# Altium PCB gprs1.PcbDoc (part 1 of 2)
Units mil, origin at the board's own origin, x right, y up, seen from the top; angles counter-clockwise.
Board outline 5204.72 x 2838.58 mil, 2 copper layers (Top Layer, Bottom Layer); 114 components, 66 nets, 333 pads, 440 vias.
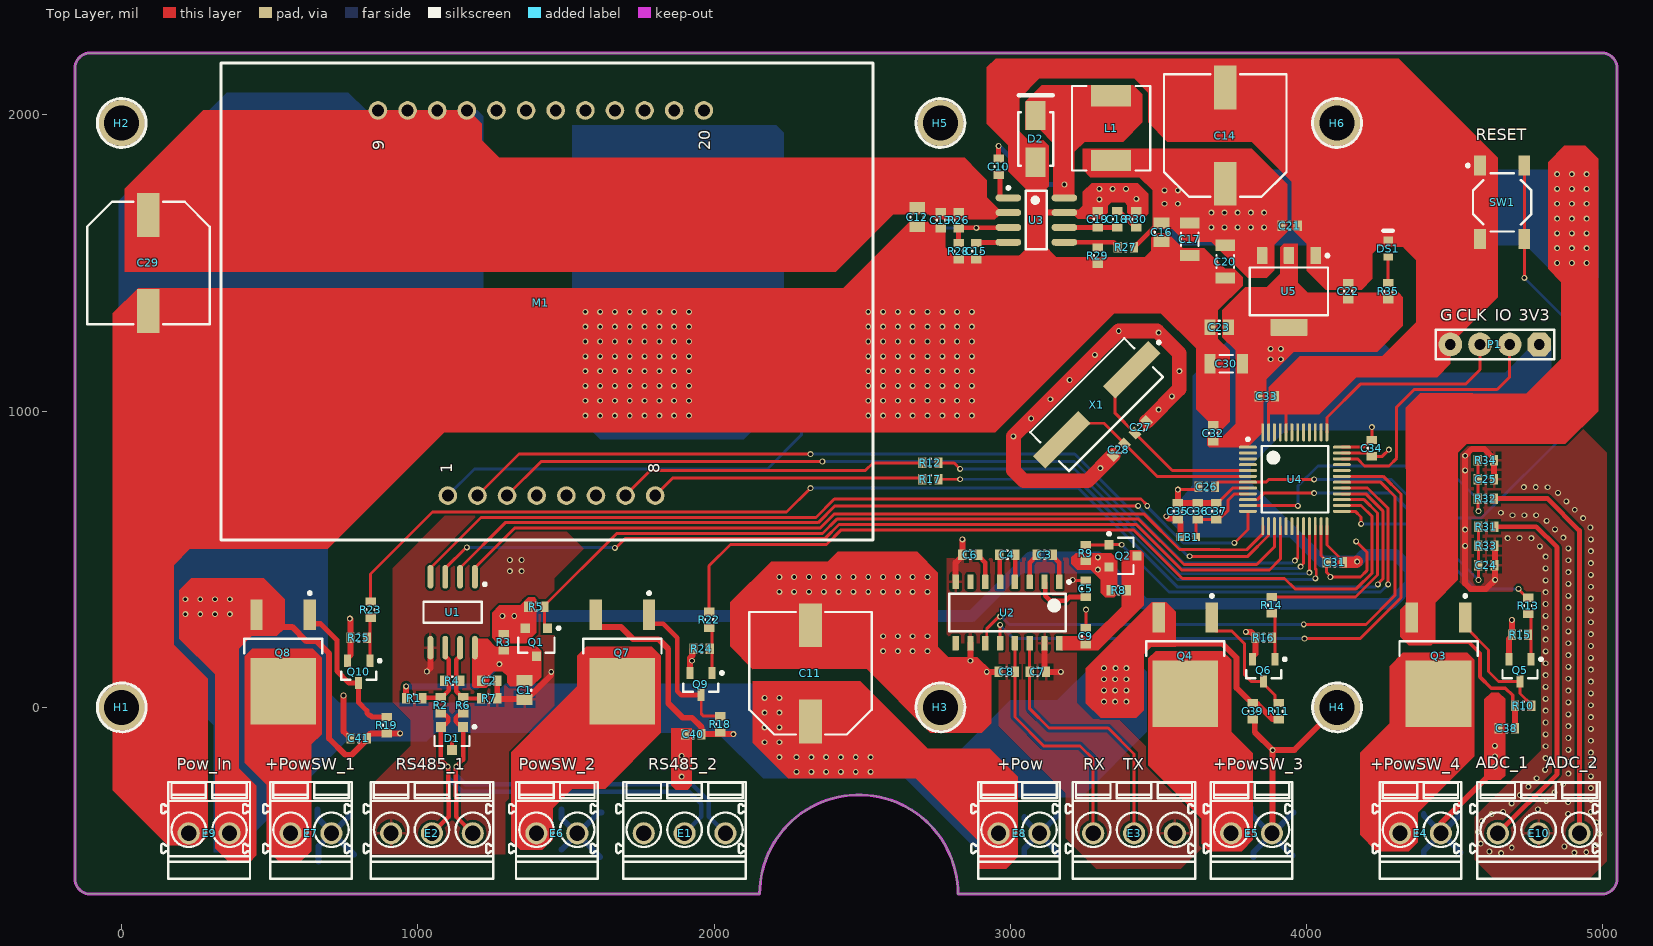
[diagram p0: Top Layer view]
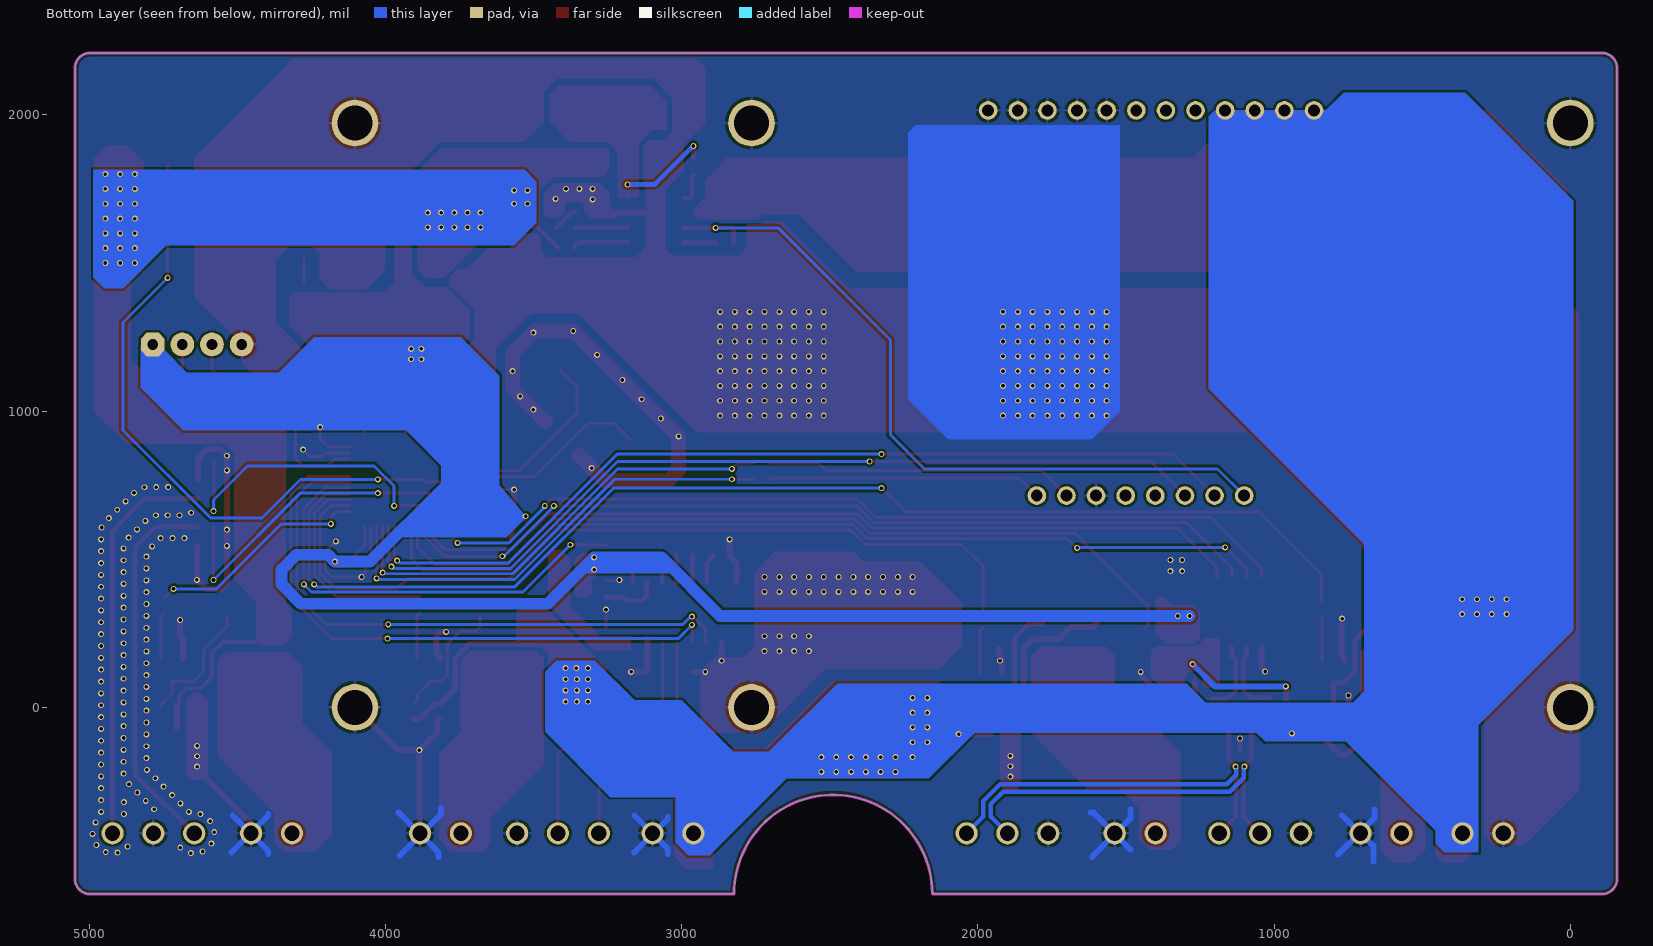
[diagram p1: Bottom Layer view, seen from below]
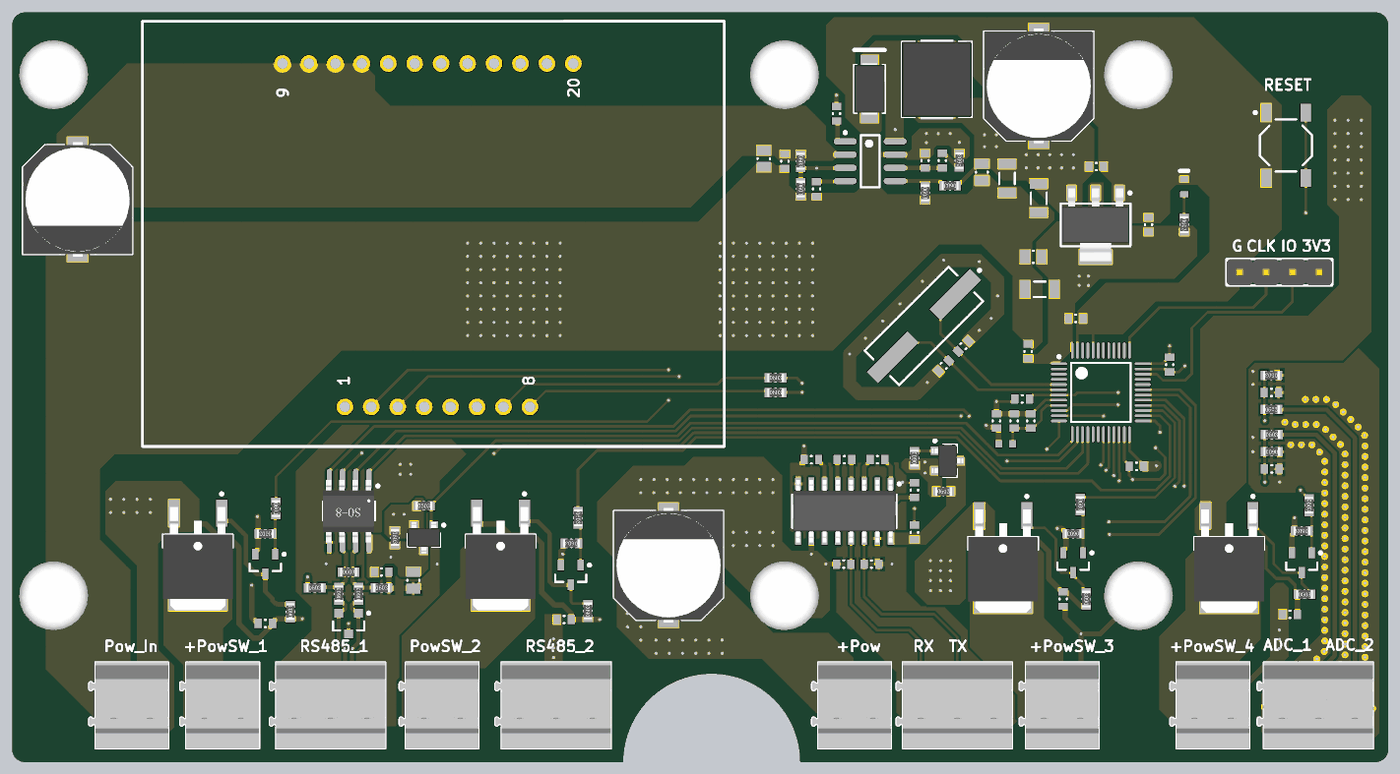
[diagram p3: 3D render of the assembled board from above, using the file's embedded part models]

## Layer stack, top to bottom
Top Solder: solder mask 0.4, Solder Resist, Dk 3.5
Top Layer: signal copper 1.4
Dielectric 1: dielectric 12.6, FR-4, Dk 4.8
Bottom Layer: signal copper 1.4
Bottom Solder: solder mask 0.4, Solder Resist, Dk 3.5

## Board outline
-157.48,-579.92 -157.48,2158.66 cw(c-107.48,2158.66) -107.48,2208.66 4997.24,2208.66 cw(c4997.24,2158.66) 5047.24,2158.66 5047.24,-579.92 cw(c4997.24,-579.92) 4997.24,-629.92 2822.83,-629.92 ccw(c2488.19,-629.92) 2153.54,-629.92 -107.48,-629.92 cw(c-107.48,-579.92)

## Design rules (kind name [scope] priority, off if disabled: settings)
Clearance [All] p1: gap=8 ignorepadtopadclearanceinfootprint=TRUE
DiffPairsRouting [All] p1: maxlimit=10 minlimit=10 mostfreqgap=10 toplayer_minwidth=15 toplayer_maxwidth=15 toplayer_prefwidth=15 bottomlayer_minwidth=15 bottomlayer_maxwidth=15 bottomlayer_prefwidth=15 maxuncoupledlength=500
MinimumSolderMaskSliver [All] p1: minsoldermaskwidth=1
PolygonConnect [All] p1: thpad.connectstyle=Relief thpad.reliefconductorwidth=10 thpad.reliefentries=4 thpad.polygonreliefangle="90 Angle" thpad.airgapwidth=10 smdpad.connectstyle=Relief smdpad.reliefconductorwidth=10 smdpad.reliefentries=4 smdpad.polygonreliefangle="90 Angle" smdpad.airgapwidth=10 via.connectstyle=Direct via.reliefconductorwidth=10 via.reliefentries=4 via.polygonreliefangle="90 Angle" via.airgapwidth=10
RoutingVias [All] p1: holewidth=12 width=20 viastyle="Through Hole" minholewidth=12 minwidth=20 maxholewidth=12 maxwidth=20
SolderMaskExpansion [All] p1: expansion=3
Width [All] p1: maxlimit=100 minlimit=8 preferedwidth=10
28 further rules are at their usual default settings.

## Classes and differential pairs
component class stm32f103c8: C20 C21 C22 C23 C24 C25 C26 C27 C28 C29 C30 C31 C32 C33 C34 C35 C36 C37 DS1 E10 FB1 M1 P1 R12 R17 R31 R32 R33 R34 R35 SW1 U4 U5 X1
component class power: C10 C11 C12 C13 C14 C15 C16 C17 C18 C19 C38 C39 C40 C41 D2 E4 E5 E6 E7 E8 E9 H1 H2 H3 H4 H5 H6 L1 Q3 Q4 Q5 Q6 Q7 Q8 Q9 Q10 R10 R11 R13 R14 R15 R16 R18 R19 R22 R23 R24 R25 R26 R27 R28 R29 R30 U3
component class 485&232: C1 C2 C3 C4 C5 C6 C7 C8 C9 D1 E1 E2 E3 Q1 Q2 R1 R2 R3 R4 R5 R6 R7 R8 R9 U1 U2
differential pair RS485: +RS485_P -RS485_N
differential pair 485: +485_P -485_N

## Components (designator, comment, footprint, x,y, rotation, side; value= is the part's Value field where it differs from the comment)
C1 "10uF" CAPC0805(2012)145_L 1360,58.5 r90 top
C2 "0.1uF" CAPC0603(1608)100_L 1240,90 r180 top
C3 "0.1uF" CAPC0603(1608)100_L 3115,515 r180 top
C4 "0.1uF" CAPC0603(1608)100_L 2990,515 r0 top
C5 "0.1uF" CAPC0603(1608)100_L 3255,400 r90 top
C6 "0.1uF" CAPC0603(1608)100_L 2865,515 r180 top
C7 "100pF" CAPC0603(1608)100_L 3092.56,120 r180 top
C8 "100pF" CAPC0603(1608)100_L 2987.44,120 r0 top
C9 "0.1uF" CAPC0603(1608)100_L 3255,240 r270 top
C10 "0.1uF" CAPC0603(1608)100_L 2960,1825 r90 top
C11 "VZL681M1CTR-1010" PNSC-SVP-F12_L 2325,115 r90 top
C12 "10uF" CAPC0805(2012)145_L 2685,1655 r90 top
C13 "0.1uF" CAPC0603(1608)100_L 2765,1645 r90 top
C14 "VEJ102M1ATR-1010" PNSC-SVP-F12_L 3725,1930 r90 top
C15 "0.1uF" CAPC0603(1608)100_L 2885,1540 r90 top
C16 "10uF" CAPC0805(2012)145_L 3510,1603.5 r90 top
C17 "47uF" CAPC1206(3216)150_L 3605,1580 r90 top
C18 "4700pF" CAPC0603(1608)100_L 3360,1647.56 r270 top
C19 "39pF" CAPC0603(1608)100_L 3295,1647.56 r270 top
C20 "47uF" CAPC1206(3216)150_L 3725,1504.88 r90 top
C21 "0.1uF" CAPC0603(1608)100_L 3942.44,1625 r180 top
C22 "0.1uF" CAPC0603(1608)100_L 4140,1405 r270 top
C23 "10uF" CAPC0805(2012)145_L 3705,1282.87 r0 top
C24 "1nF" CAPC0603(1608)100_L 4606.44,480 r180 top
C25 "1nF" CAPC0603(1608)100_L 4604.94,769.76 r180 top
C26 "0.1uF" CAPC0603(1608)100_L 3662.59,745 r0 top
C27 "20pF" CAPC0603(1608)100_L 3440,945 r225 top
C28 "20pF" CAPC0603(1608)100_L 3365.78,870 r45 top
C29 "6SVP820M" PNSC-SVP-F12_L 90,1500 r270 top
C30 "47uF" CAPC1206(3216)150_L 3728.62,1160 r0 top
C31 "0.1uF" CAPC0603(1608)100_L 4095,490 r0 top
C32 "0.1uF" CAPC0603(1608)100_L 3685,925 r270 top
C33 "0.1uF" CAPC0603(1608)100_L 3865,1050 r180 top
C34 "0.1uF" CAPC0603(1608)100_L 4220,875 r90 top
C35 "10uF" CAPC0603(1608)100_L 3565,661.73 r270 top
C36 "0.1uF" CAPC0603(1608)100_L 3631.85,661.73 r270 top
C37 "1nF" CAPC0603(1608)100_L 3695,661.73 r270 top
C38 "0.1uF" CAPC0603(1608)100_L 4675,-70 r0 top
C39 "0.1uF" CAPC0603(1608)100_L 3817.6,-12.49 r90 top
C40 "0.1uF" CAPC0603(1608)100_L 1930,-90 r0 top
C41 "0.1uF" CAPC0603(1608)100_L 800,-105 r0 top
D1 "CDSOT23-SM712" BOUR-SOT23-3_V 1115,-105 r270 top
D2 "B340A-13-F" DIOD-SMA-2_V 3085,1918.74 r90 top
DS1 "TLMS1100-GS08" VISH-TLMX1100_V 4275,1548.54 r90 top
E1 "1667770000" LM_3_5_90_03 1900,-415.16 r180 top
E2 "1667770000" LM_3_5_90_03 1047.2,-415.16 r180 top
E3 "1667770000" LM_3_5_90_03 3417.2,-415.16 r180 top
E4 "1667750000" LM_3_5_90_02 4383.9,-415.16 r180 top
E5 "1667750000" LM_3_5_90_02 3813.9,-415.16 r180 top
E6 "1667750000" LM_3_5_90_02 1468.9,-415.16 r180 top
E7 "1667750000" LM_3_5_90_02 638.9,-415.16 r180 top
E8 "1667750000" LM_3_5_90_02 3028.9,-415.16 r180 top
E9 "1667750000" LM_3_5_90_02 295,-415.16 r180 top
E10 "1667770000" LM_3_5_90_03 4782.8,-415.16 r180 top
FB1 "BLM18BB141SN1D" MURA-BLM18-RF-H4-CHIP-2_V 3600,575 r0 top
H1 "HOLE" HOLE_Φ3_3 0,0 r0 top locked
H2 "HOLE" HOLE_Φ3_3 0,1972.44 r0 top locked
H3 "HOLE" HOLE_Φ3_3 2763.78,0 r0 top locked
H4 "HOLE" HOLE_Φ3_3 4102.36,0 r0 top locked
H5 "HOLE" HOLE_Φ3_3 2763.78,1972.44 r0 top locked
H6 "HOLE" HOLE_Φ3_3 4102.36,1972.44 r0 top locked
L1 "IHLP2525CZER6R8" VISH-IHLP2525CZER220M11_V 3340,1955 r270 top
M1 "GPRS" GPRS 1100.83,715 r90 top locked
P1 "UART1" header4 4785,1225 r180 top
Q1 "AO3401A" AO-SOT-23-3L_V 1400,220 r270 top
Q2 "AO3401A" AO-SOT-23-3L_V 3380,511.06 r0 top
Q3 "AOD417" DIOD-TO252-3_V 4445,143.94 r270 top
Q4 "AOD417" DIOD-TO252-3_V 3590,143.94 r270 top
Q5 "S8050" KOCN-SOT23-3_L 4720,125 r270 top
Q6 "S8050" KOCN-SOT23-3_L 3855,125 r270 top
Q7 "AOD417" DIOD-TO252-3_V 1690,153.33 r270 top
Q8 "AOD417" DIOD-TO252-3_V 545,153.33 r270 top
Q9 "S8050" KOCN-SOT23-3_L 1955,78.76 r270 top
Q10 "S8050" KOCN-SOT23-3_L 800,120 r270 top
R1 "720" RESC0603(1608)_L 987.44,30 r0 top
R2 "10" RESC0603(1608)_L 1077.6,7.6 r90 top
R3 "DNP" RESC0603(1608)_L 1290,220 r270 top
R4 "120" RESC0603(1608)_L 1115,90 r0 top
R5 "100k" RESC0603(1608)_L 1400,340.12 r0 top
R6 "10" RESC0603(1608)_L 1152.4,7.6 r90 top
R7 "720" RESC0603(1608)_L 1240,30 r0 top
R8 "DNP" RESC0603(1608)_L 3365,395 r0 top
R9 "100k" RESC0603(1608)_L 3255,521.06 r90 top
R10 "4.7K" RESC0603(1608)_L 4730.4,5 r0 top
R11 "4.7K" RESC0603(1608)_L 3905,-12.49 r90 top
R12 "22" RESC0603(1608)_L 2730,825 r0 top
R13 "4.7K" RESC0603(1608)_L 4747.56,342.56 r270 top
R14 "4.7K" RESC0603(1608)_L 3882.8,345 r270 top
R15 "10K" RESC0603(1608)_L 4720,245 r180 top
R16 "10K" RESC0603(1608)_L 3855,235 r180 top
R17 "22" RESC0603(1608)_L 2730,769.42 r0 top
R18 "4.7K" RESC0603(1608)_L 2020,-57.4 r90 top
R19 "4.7K" RESC0603(1608)_L 895,-60 r90 top
R22 "4.7K" RESC0603(1608)_L 1982.56,295 r270 top
R23 "4.7K" RESC0603(1608)_L 840,330 r270 top
R24 "10K" RESC0603(1608)_L 1957.56,198.33 r180 top
R25 "10K" RESC0603(1608)_L 800,235 r180 top
R26 "DNP" RESC0603(1608)_L 2825,1645 r270 top
R27 "10K" RESC0603(1608)_L 3390,1552.56 r180 top
R28 "10K" RESC0603(1608)_L 2825,1540 r270 top
R29 "1.91K" RESC0603(1608)_L 3295,1525 r270 top
R30 "49.9" RESC0603(1608)_L 3425,1647.56 r90 top
R31 "43.2k" RESC0603(1608)_L 4606.44,610 r0 top
R32 "43.2k" RESC0603(1608)_L 4604.94,704.76 r0 top
R33 "8.66k" RESC0603(1608)_L 4606.44,545 r180 top
R34 "8.66k" RESC0603(1608)_L 4604.94,834.76 r180 top
R35 "1k" RESC0603(1608)_L 4275,1405 r270 top
SW1 "TL3342F160QG" ESWI-TL3342F160QG_V 4660,1705 r0 top
U1 "MAX3485CSA+" SOIC-8 1115,325 r180 top
U2 "MAX3232CDR" D0016A_L 2990,320 r270 top
U3 "TPS54331DR" D8_N 3087.56,1645 r0 top
U4 "STM32F103C8T6" STM-LQFP48_L 3960,770 r0 top
U5 "LM1117MP-3.3/NOPB" DCY0004A_L 3940,1403.94 r270 top
X1 "HCM49-8.000MABJ-UT" CFM-HCM49-2_V 3290.74,1021.68 r225 top

## Footprints (in the part's own frame and the unit in brackets; to place one, negate y for a bottom-side part, rotate by r counter-clockwise, add the part's x,y. Pads: shape width x height; smd on the part's side, far side on the other; paste and mask are expansions set on the pad)
AO-SOT-23-3L_V [mm] "SOT23, 3-Leads, Body 3.1x1.8mm, Pitch 0.95mm"
  rect 0.8x0.8 smd: 1(-1.2,0.95) 2(-1.2,-0.95) 3(1.2,0)
  silkscreen extent -1.32,-1.55 0.9,2.03, body extent -1.5,-1.55 1.5,1.55, height 1.25
BOUR-SOT23-3_V [mm] "SOT23, 3-Leads, Body 2.9x1.3mm, Pitch 0.95mm"
  rect 0.85x0.85 smd: 1(-1,0.95) 2(-1,-0.95) 3(1,0)
  silkscreen extent -1.12,-1.5 0.65,2.05, body extent -0.65,-1.45 0.65,1.45, height 1.17
CAPC0603(1608)100_L [mm]
  rect 0.7x0.9 smd: 1(-0.7,0) 2(0.7,0)
  silkscreen extent -0.05,-0.35 0.05,0.35, body extent -0.87,-0.47 0.88,0.48, height 1
CAPC0805(2012)145_L [mm]
  rect 0.95x1.35 smd: 1(-0.8,0) 2(0.8,0)
  silkscreen extent -0.05,-0.58 0.05,0.58, body extent -1.1,-0.72 1.1,0.72, height 1.45
CAPC1206(3216)150_L [mm]
  rect 0.95x1.7 smd: 1(-1.4,0) 2(1.4,0)
  silkscreen extent -0.55,-0.75 0.55,0.75, body extent -1.7,-0.9 1.7,0.9, height 1.5
CFM-HCM49-2_V [mm] "SMD, 2-Leads, Body 11.4x4.7mm, Pitch 8.5mm"
  rect 5.5x1.5 smd: 1(-4.25,0) 2(4.25,0)
  silkscreen extent -7.67,-2.35 5.7,2.35, body extent -5.7,-2.35 5.7,2.35, height 4.3
D8_N [mm] "SOIC, 8-Leads, Body 4.9x3.9mm, Pitch 1.27mm, IPC Medium Density"
  oval 2.2x0.6 smd: 1(-2.4,1.905) 2(-2.4,0.635) 3(-2.4,-0.635) 4(-2.4,-1.905) 5(2.4,-1.905) 6(2.4,-0.635) 7(2.4,0.635) 8(2.4,1.905)
  silkscreen extent -2.52,-2.5 0.9,2.88, body extent -2,-2.5 2,2.5, height 1.75
D0016A_L [mm]
  rrect18% 1.25x0.55 smd: 1(-2.625,4.445) 2(-2.625,3.175) 3(-2.625,1.905) 4(-2.625,0.635) 5(-2.625,-0.635) 6(-2.625,-1.905) 7(-2.625,-3.175) 8(-2.625,-4.445) 9(2.625,-4.445) 10(2.625,-3.175) 11(2.625,-1.905) 12(2.625,-0.635) 13(2.625,0.635) 14(2.625,1.905) 15(2.625,3.175) 16(2.625,4.445)
  silkscreen extent -2.75,-5 1.6,5.4, body extent -3,-4.95 3,4.95, height 1.59
DCY0004A_L [mm] "SOT223, 4-Leads, Body 6.7x3.7mm, Pitch 2.3mm, IPC High Density"
  rrect11% 1.45x0.9 smd: 1(-3.075,2.3) 2(-3.075,0) 3(-3.075,-2.3)
  rrect7% 1.45x3.15 smd: 4(3.075,0)
  silkscreen extent -3.2,-3.35 2.05,3.43, body extent -3.5,-3.25 3.5,3.25, height 1.62
DIOD-SMA-2_V [mm] "Molded Diode, 2-Leads, Body 4.6x2.92mm"
  rect 2.5x1.7 smd: 1(-2,0) 2(2,0)
  silkscreen extent -2.3,-1.5 3.75,1.5, body extent -2.52,-1.46 2.52,1.46, height 2.4
DIOD-TO252-3_V [mm] "DPAK, 3-Leads, Body 6.7x6.2mm, Pitch 2.286mm"
  rect 2.6x1.06 smd: 1(-4.05,2.286) 2(-4.05,-2.286)
  rect 5.7x5.632 smd: 3(2.5,0)
  silkscreen extent -6.02,-3.35 -0.75,3.35, body extent -4.63,-3.35 5.28,3.35, height 2.39
ESWI-TL3342F160QG_V [mm] "SMD, 4-Leads, Body 5x5mm, Pitch 6.3mm"
  rect 1x1.7 smd: 1(-1.9,3.15) 2(-1.9,-3.15) 3(1.9,3.15) 4(1.9,-3.15)
  silkscreen extent -3.07,-2.5 2.5,3.27, body extent -2.5,-2.5 2.5,2.5, height 1.5
GPRS [mm]
  round 1.6 hole 1.02: 1(0,0) 2(0,-2.54) 3(0,-5.08) 4(0,-7.62) 5(0,-10.16) 6(0,-12.7) 7(0,-15.24) 8(0,-17.78) 9(33.02,5.99) 10(33.02,3.45) 11(33.02,0.91) 12(33.02,-1.63) 13(33.02,-4.17) 14(33.02,-6.71) 15(33.02,-9.25) 16(33.02,-11.79) 17(33.02,-14.33) 18(33.02,-16.87) 19(33.02,-19.41) 20(33.02,-21.95)
  silkscreen extent -3.81,-36.45 37.08,19.43, body extent -3.42,-36.01 36.58,18.99, height 7
header4 [mil]
  oct 80x80 hole 36: 1(0,0)
  round 80 hole 36: 2(100,0) 3(200,0) 4(300,0)
  silkscreen extent -50,-50 350,50, body extent -50,-50 350,50, height 398
HOLE_Φ3_3 [mm]
  round 4 hole 3: 1(0,0)
  silkscreen extent -2.09,-2.09 2.09,2.09, body extent -3.3,-3.3 3.3,3.3, height 2.69
KOCN-SOT23-3_L [mm] "SOT23, 3-Leads, Body 1.35x2.95mm, Pitch 0.95mm, IPC High Density"
  rect 1.05x0.6 smd: 1(-0.95,0.95) 2(-0.95,-0.95) 3(0.95,0)
  silkscreen extent -1.07,-1.5 0.67,1.93, body extent -0.67,-1.47 0.67,1.48, height 1.1
LM_3_5_90_02 [mm] "OMNIMATE Signal - Serie LM  LM 3.50/02/90 3.2"
  round 1.9 hole 1.3: A1(-1.75,0.25) A2(1.75,0.25)
  silkscreen extent -3.5,-4.15 4.1,4.15, body extent -3.5,-4.15 4.1,4.15, height 12.81
LM_3_5_90_03 [mm] "OMNIMATE Signal - Serie LM  LM 3.50/03/90 3.2"
  round 1.9 hole 1.3: A1(-3.5,0.25) A2(0,0.25) A3(3.5,0.25)
  silkscreen extent -5.25,-4.15 5.85,4.15, body extent -5.25,-4.15 5.85,4.15, height 12.81
MURA-BLM18-RF-H4-CHIP-2_V [mm] "Chip Ferrite Bead, 2-Leads, Body 1.6x0.8mm, Height 0.95mm, Reflow"
  rect 0.65x0.7 smd: 1(-0.675,0) 2(0.675,0)
  body extent -0.8,-0.4 0.8,0.4, height 0.95
PNSC-SVP-F12_L [mm] "Aluminum Electrolytic Capacitor, Body 10.50x10.50x12.70mm, IPC High Density"
  rect 3.75x1.95 smd: 1(-4.125,0) 2(4.125,0)
  silkscreen extent -5.25,-5.25 5.25,5.25, body extent -5.5,-5.25 5.5,5.25, height 12.7
RESC0603(1608)_L [mm]
  rect 0.7x0.9 smd: 1(-0.7,0) 2(0.7,0)
  silkscreen extent -0.05,-0.35 0.05,0.35, body extent -0.8,-0.4 0.8,0.4, height 0.45
SOIC-8 [mil]
  oval 20x80 smd: 1(-77.09,-115.71) 2(-27.09,-115.71) 3(22.91,-115.71) 4(72.91,-115.71) 5(72.91,123.27) 6(22.91,123.27) 7(-27.09,123.27) 8(-77.09,123.27)
  silkscreen extent -115,-96 96,39, body extent -96,-113 96,123, height 67
STM-LQFP48_L [mm] "QFP, 48-Leads, Body 7x7mm, Pitch 0.5mm, IPC High Density"
  oval 1.55x0.25 smd: 1(-4.025,2.75) 2(-4.025,2.25) 3(-4.025,1.75) 4(-4.025,1.25) 5(-4.025,0.75) 6(-4.025,0.25) 7(-4.025,-0.25) 8(-4.025,-0.75) 9(-4.025,-1.25) 10(-4.025,-1.75) 11(-4.025,-2.25) 12(-4.025,-2.75) 25(4.025,-2.75) 26(4.025,-2.25) 27(4.025,-1.75) 28(4.025,-1.25) 29(4.025,-0.75) 30(4.025,-0.25) 31(4.025,0.25) 32(4.025,0.75) 33(4.025,1.25) 34(4.025,1.75) 35(4.025,2.25) 36(4.025,2.75)
  oval 0.25x1.55 smd: 13(-2.75,-4.025) 14(-2.25,-4.025) 15(-1.75,-4.025) 16(-1.25,-4.025) 17(-0.75,-4.025) 18(-0.25,-4.025) 19(0.25,-4.025) 20(0.75,-4.025) 21(1.25,-4.025) 22(1.75,-4.025) 23(2.25,-4.025) 24(2.75,-4.025) 37(2.75,4.025) 38(2.25,4.025) 39(1.75,4.025) 40(1.25,4.025) 41(0.75,4.025) 42(0.25,4.025) 43(-0.25,4.025) 44(-0.75,4.025) 45(-1.25,4.025) 46(-1.75,4.025) 47(-2.25,4.025) 48(-2.75,4.025)
  silkscreen extent -4.15,-2.85 2.85,3.55, body extent -3.5,-3.5 3.5,3.5, height 1.6
VISH-IHLP2525CZER220M11_V [mm] "SMD, 2-Leads, Body 7.24x6.72mm"
  rect 1.83x3.43 smd: 1(-2.77,0) 2(2.77,0)
  silkscreen extent -3.62,-3.36 3.62,3.36, body extent -3.84,-3.36 3.84,3.36, height 3
VISH-TLMX1100_V [mm] "SMD, 2-Leads, Body 1.6x0.8mm"
  rect 0.6x0.8 smd: 1(-0.725,0) 2(0.725,0)
  silkscreen extent 1.53,-0.4 1.53,0.4, body extent -0.8,-0.4 0.8,0.4, height 0.65

## Part data
C1 C12 C16 C23: library part CAP_5_1, "0805 (2012 Metric) Chip Capacitor", Case-EIA=0805, Case-Metric=2012, PackageReference=CAPC0805(2012)145
C2 C3 C4 C5 C6 C9 C21 C22 C24 C25 C26 C27 C28 C31 C32 C33 C34 C35 C36 C37: library part CAP_5, "0603 (1608 Metric) Chip Capacitor", Case-EIA=0603, Case-Metric=1608, PackageReference=CAPC0603(1608)100
C7 C8 C10 C13 C15 C18 C19 C38 C39 C40 C41: library part CMP-1590-00005-1, "0603 (1608 Metric) Chip Capacitor", Case-EIA=0603, Case-Metric=1608, PackageReference=CAPC0603(1608)100
C11: library part CMP-2000-05494-1, "680uF,16V,-55~105℃", Capacitance=680μF, Lifetime @ Temp.=2000Hrs@105°C, Manufacturer=Lelon, Operating Temperature=-55°C~105°C, Package / Case=Radial,Can-SMD, Package Description="2-Pin Surface Mount Device, Body 10.3 x 10.3 mm", Ripple Current=4.72A, Standard Package=400, Tolerance=±20%, Voltage Rating=16V, Category=Capacitors, Datasheet URL=https://atta.szlcsc.com/upload/public/pdf/source/20171023/C134843_15087477624341052967.pdf, Family="Aluminum Capacitors", Mounting Technology=SurfaceMount, Mounting Type=SurfaceMount, Online Catalog=OS-CON,SVPSeries, Other Names=P16463TR, Packaging=Tape&Reel(TR), Polarization=Polar, Series=OS-CON,SVP, Size / Dimension="0.394\"Dia(10.00mm)", Surface Mount Land Size="0.406\"Lx0.406\"W(10.30mmx10.30mm)"
C14: library part CMP-2000-05494-1, "1000uF,10V,-55~105℃", Capacitance=1000μF, Lifetime @ Temp.=2000Hrs@105°C, Manufacturer=Lelon, Operating Temperature=-55°C~105°C, Package / Case=Radial,Can-SMD, Package Description="2-Pin Surface Mount Device, Body 10.3 x 10.3 mm", Ripple Current=4.72A, Standard Package=400, Tolerance=±20%, Voltage Rating=10V, Category=Capacitors, Datasheet URL=https://atta.szlcsc.com/upload/public/pdf/source/20171023/C134843_15087477624341052967.pdf, Family="Aluminum Capacitors", Mounting Technology=SurfaceMount, Mounting Type=SurfaceMount, Online Catalog=OS-CON,SVPSeries, Other Names=P16463TR, Packaging=Tape&Reel(TR), Polarization=Polar, Series=OS-CON,SVP, Size / Dimension="0.394\"Dia(10.00mm)", Surface Mount Land Size="0.406\"Lx0.406\"W(10.30mmx10.30mm)"
C17 C20 C30: library part CAP_5_3, "1206 (3216 Metric) Chip Capacitor", Case-EIA=1206, Case-Metric=3216, PackageReference=CAPC1206(3216)150
C29: library part CMP-2000-05494-1, "Conductive Polymer Aluminum Solid Capacitor, 820 uF, +/- 20%, 6.3 V, -55 to 105 degC, 2-Pin SMD (F12), RoHS, Tape and Reel", Capacitance=330μF, ESR (Equivalent Series Resistance)=16mOhm, Lifetime @ Temp.=2000Hrs@105°C, Manufacturer=Panasonic, Operating Temperature=-55°C~105°C, Package / Case=Radial,Can-SMD, Package Description="2-Pin Surface Mount Device, Body 10.3 x 10.3 mm", Package Reference=SVP-F12, Ripple Current=4.72A, Standard Package=400, Tolerance=±20%, Voltage Rating=16V, Category=Capacitors, Datasheet URL=https://industrial.panasonic.com/cdbs/www-data/pdf/AAB8000/AAB8000C193.pdf, Datasheet Version=11/2015, EDA / CAD Models=DownloadfromAcceleratedDesigns, Family=Aluminum-PolymerCapacitors, Featured Product=OS-CONCapacitorsHotNewTechnologies, Height - Seated (Max)="0.500\"(12.70mm)", Manufacturer URL=http://www.panasonic.com/, Mounting Technology=SurfaceMount, Mounting Type=SurfaceMount, Online Catalog=OS-CON,SVPSeries, Other Names=P16463TR, Packaging=Tape&Reel(TR), Polarization=Polar, Series=OS-CON,SVP, Size / Dimension="0.394\"Dia(10.00mm)", Surface Mount Land Size="0.406\"Lx0.406\"W(10.30mmx10.30mm)"
D1: library part CMP-2000-05081-1, "Surface Mount TVS Diode, 17 A Ipp, -55 to 150 degC, 3-Pin SOT23, RoHS, Tape and Reel", Capacitance @ Frequency=75pF@1MHz, Current - Peak Pulse (10/1000μs)=17A(8/20μs), Manufacturer=Bourns, Operating Temperature=-55degC~150degC(TJ), Package / Case=TO-236-3,SC-59,SOT-23-3, Package Description="3-Lead Small Out-Line Transistor, Body 2.9x1.3mm, Pitch 0.95mm", Power - Peak Pulse=400W, Power Line Protection=No, Standard Package=1, Supplier Device Package=SOT-23-3, Voltage - Breakdown (Min)=7.5V,13.3V, Voltage - Clamping (Max) @ Ipp=14V,26V, Voltage - Reverse Standoff (Typ)=7V(Max),12V(Max), Applications=GeneralPurpose, Bidirectional Channels=2, Catalog Drawings=CDSOT23-SM712Schematic, Category=CircuitProtection, Datasheet URL=https://datasheet.ciiva.com/11193/cdsot23-sm712-11193846.pdf, Datasheet Version=Aug-12, Family=TVS-Diodes, For Use With=EVAL-CN0313-SDPZ-ND-EVALEMCRS-485CERTIFIED, Kits=PN-DESIGNKIT-22-ND-KITESD/EFTSURGEPROTECTION, Manufacturer URL=http://www.bourns.com/, Mounting Type=SurfaceMount, Online Catalog=CDSOT23Series, Other Names=CDSOT23-SM712CT, Packaging=CutTape(CT)??, Product Training Modules=ESDProtectionProducts, Related Products=ADM3485EARZ-REEL7TR-ND-ICTXRXRS-485HS3.3V8SOICADM3485EARZ-REEL7CT-ND-ICTXRXRS-485HS3.3V8SOICADM3485EARZ-REEL7DKR-ND-ICTXRXRS-485HS3.3V8SOICADM3485EARZ-ND-ICTX/RXRS-485HS3.3V8-SOICADM3485EAR-ND-ICTX/RXRS-485HS3.3V8-SOIC296-38503-5-ND-ICTXRXRS4853.3VESD14SOIC296-38501-5-ND-ICRS485TXRX3.3ESD8SOIC296-38522-5-ND-ICTXRXRS4853.3V14SOIC296-38502-5-ND-ICTXRXRS4853.3VESD14SOICADM3485EARZ-REELTR-ND-ICTXRXRS-4853.3V8SOICADM3485EARZ-REELCT-ND-ICTXRXRS-4853.3V8SOICADM3485EARZ-REELDKR-ND-ICTXRXRS-4853.3V8SOIC296-40517-2-ND-ICTXRXRS4853.3V14SOIC296-40517-1-ND-ICTXRXRS4853.3V14SOIC296-40517-6-ND-ICTXRXRS4853.3V14SOIC296-40519-2-ND-ICRS485TXRX3.3ESD8SOIC296-40519-1-ND-ICRS485TXRX3.3ESD8SOIC296-40519-6-ND-ICRS485TXRX3.3ESD8SOIC296-40524-2-ND-ICTXRXRS4853.3VESD8SOIC296-40524-1-ND-ICTXRXRS4853.3VESD8SOIC296-40524-6-ND-ICTXRXRS4853.3VESD8SOIC296-40522-2-ND-ICTXRXRS4853.3VESD14SOIC296-40522-1-ND-ICTXRXRS4853.3VESD14SOIC296-40522-6-ND-ICTXRXRS4853.3VESD14SOIC296-40529-2-ND-ICRS485TXRX3.3ESD8SOIC296-40529-1-ND-ICRS485TXRX3.3ESD8SOIC2, Series=-, Type=Zener, Unidirectional Channels=-
D2: library part CMP-1667-00003-1, "Surface Mount Schottky Barrier Rectifier, 40 V, 3 A, -55 to 150 degC, 2-Pin SMA, RoHS, Tape and Reel", Case\Package=SMA, Forward Current="3 A", Forward Voltage="500 mV", Max Operating Temperature="125 degC", Max Surge Current="80 A", Min Operating Temperature="-55 degC", Package Quantity=5000, Peak Reverse Current="500 uA", ComponentLink1Description="Manufacturer URL", ComponentLink1URL=http://www.diodes.com/, ComponentLink2Description=Datasheet, ComponentLink2URL=http://www.diodes.com/_files/datasheets/ds30891.pdf, DatasheetVersion="Rev. 17 - 2, 09/2015", Elements=1, Height="2.1 mm", Length="4.6 mm", Mount="Surface Mount", Mounting Technology="Surface Mount", PackageDescription="2-Pin Surface Mounted Assembly, Body 4.3 x 2.605 mm, Height 2.4 mm", PackageReference=SMA-2, Packaging="Tape and Reel", Pins=2, Radiation Hardening=No, REACH SVHC="No SVHC", RoHSCompliant=true, Width="2.92 mm"
DS1: library part CMP-1666-00027-1, "LED, RED,?2.1 V, -40 to 100 degC, 2-Pin?SMD?(0603), RoHS, Tape and Reel", Capacitance="12 pF", Case/Package=0603, Case Code (Metric)=1608, Max Operating Temperature=125degC, Min Operating Temperature=-55degC, Package Quantity=4000, Resistance="100000000000 Ohm", Tolerance=5%, Type (Capacitors)=C0G, Voltage Rating="50 V", Case Code (Imperial)=0603, ComponentLink1Description="Manufacturer URL", ComponentLink1URL=http://www.vishay.com/, ComponentLink2Description=Datasheet, ComponentLink2URL=http://www.vishay.com/docs/83173/tlmb1100.pdf, DatasheetVersion="Rev. 2.7, 03/2016", Height="0.8 mm", Length="1.6 mm", Mount="Surface Mount", PackageDescription="2-Pin Surface Mount Device, Body 1.6 x 0.8 mm", PackageReference=TLMX1100, Packaging="Tape and Reel", Pins=2, Radiation Hardening=No, REACH SVHC="No SVHC", RoHSCompliant=True, Voltage Rating (DC)="50 V", Width="0.8 mm"
E1 E2 E3 E10: library part CMP-1559-01729-1, "OMNIMATE Signal - series LM", Colour=Orange, Manufacturer=Weidmueller, Rated_current_min_no_of_poles_TU_20_deg_C="32 A", Rated_current_use_group_B_UL_1059="10 A", Rated_voltage_for_surge_voltage_class_pollution_degree_II_2="320 V", Rated_voltage_use_group_B_UL_1059="300 V", UL_94_flammability_rating=V-2, ComponentLink1Description="Manufacturer URL", ComponentLink1URL=http://www.weidmueller.com/, ComponentLink2Description="URL Link1", ComponentLink2URL=http://catalog.weidmueller.com/catalog/Start.do?localeId=en&ObjectID=1667770000, Contact_material=Cu-Leg, Contact_surface=tinned, Insulating_material=PA, Mounting_onto_the_PCB="Solder connection", No_of_poles=3, PackageReference=LM_3_5_90_03, Packaging=Box, PartNumber=1667770000, Pitch_inch="0,138 inch", Pitch_mm="3,5 mm", Qty="100 PCS", Revision=V1, Short_text_for_material="LM 3.50/03/90 3.2SN OR BX", Side_termination_characteristic="closed side", Solder_pin_length_mm="3,2 mm", Solid_max_H05_07_V_U="1,5 mm2", Solid_min_H05_07_V_U="0,5 mm2", Wire_cross_section_AWG_max_UL_1059="AWG 14", Wire_cross_section_AWG_min_UL_1059="AWG 28"
E4 E5 E6 E7 E8 E9: library part CMP-1559-01728-1, "OMNIMATE Signal - series LM", Colour=Orange, Manufacturer=Weidmueller, Rated_current_min_no_of_poles_TU_20_deg_C="32 A", Rated_current_use_group_B_UL_1059="10 A", Rated_voltage_for_surge_voltage_class_pollution_degree_II_2="320 V", Rated_voltage_use_group_B_UL_1059="300 V", UL_94_flammability_rating=V-2, ComponentLink1Description="Manufacturer URL", ComponentLink1URL=http://www.weidmueller.com/, ComponentLink2Description="URL Link1", ComponentLink2URL=http://catalog.weidmueller.com/catalog/Start.do?localeId=en&ObjectID=1667750000, Contact_material=Cu-Leg, Contact_surface=tinned, Insulating_material=PA, Mounting_onto_the_PCB="Solder connection", No_of_poles=2, PackageReference=LM_3_5_90_02, Packaging=Box, PartNumber=1667750000, Pitch_inch="0,138 inch", Pitch_mm="3,5 mm", Qty="100 PCS", Revision=V1, Short_text_for_material="LM 3.50/02/90 3.2SN OR BX", Side_termination_characteristic="closed side", Solder_pin_length_mm="3,2 mm", Solid_max_H05_07_V_U="1,5 mm2", Solid_min_H05_07_V_U="0,5 mm2", Wire_cross_section_AWG_max_UL_1059="AWG 14", Wire_cross_section_AWG_min_UL_1059="AWG 28"
FB1: library part MURA-FB-2, "Chip Ferrite Bead for High-speed Signal Lines, 140 Ohm, 450 mA, -55 to 125 degC, 1.6 x 0.8 x 0.95 mm SMD, Tape and Reel", DC Resistance="0.35 Ohm Max.", Manufacturer=Murata, Operating Temperature Range="-55 to 125 degC", Rated Current="450 mA", ComponentLink1Description="Manufacturer URL", ComponentLink1URL=http://www.murata.com/, ComponentLink2Description=Datasheet, ComponentLink2URL=http://www.murata.com/products/catalog/pdf/c31e.pdf, ComponentLink3Description="Package Specification", ComponentLink3URL=http://www.murata.com/products/catalog/pdf/c31e.pdf, DatasheetVersion=08/2013, Impedance (at 100 MHz)="140 Ohm +/- 25%", Mounting Technology="Surface Mount", PackageDescription="2-Pin Chip, Body 1.6 x 0.8 mm", PackageReference=BLM18_H950-2, Packing="Tape and Reel", PartNumber=BLM18BB141SN1D
L1: library part CMP-2000-06442-1, "Low Profile, High Current IHLP(R) Inductor, 6.8 uH, +/- 20%, 2.9 A, -55 to 125 degC, 2-Pin SMD, RoHS, Tape and Reel", Current - Saturation=2.5A, Current Rating=2.9A, DC Resistance (DCR)=135mOhmMax, Frequency - Test=100kHz, Inductance=22μH, Manufacturer=Vishay, Operating Temperature=-55°C~125°C, Package / Case=NonStandard, Package Description="2-Pin Surface Mount Device, Body 6.86 x 6.47 mm", Package Reference=IHLP2525CZER220M11, Standard Package=2,000, Tolerance=±20%, Category=Inductors,Coils,Chokes, Datasheet URL=https://datasheet.ciiva.com/11798/0900766b8102c935-11798417.pdf, Datasheet Version=09/2013, Family=FixedInductors, Manufacturer URL=http://www.vishay.com/, Mounting Technology=SurfaceMount, Mounting Type=SurfaceMount, Packaging=Tape&Reel(TR), Product Training Modules=IHLPInductorSeries, Series=IHLP-2525CZ-11, Shielding=Shielded, Size / Dimension="0.270\"Lx0.255\"Wx0.118\"H(6.86mmx6.47mmx3.00mm)"
M1: library part GPRS_M
P1: library part "HEADER 4"
Q1 Q2: library part CMP-2000-05778-1, "P-Channel MOSFET, 30 V, 4 A, -55 to 150 degC, 3-Pin SOT-23-3L, RoHS, Tape and Reel", Continuous Drain Current=4A, Drain-Source On-Volt=30V, Frequency (Max)=NotRequiredMHz, Gate-Source Voltage (Max)=?12V, Manufacturer="Alpha and Omega", Operating Temperature Classification=Military, Operating Temp Range=-55Cto150C, Output Power (Max)=NotRequiredW, Package Description="3-Pin Small Outline Transistor, Body 2.95 x 1.6 mm, Pitch 0.95 mm", Package Reference=SOT-23-3L, Package Type=SOT-23, Power Dissipation=1.4W, Power Gain=NotRequireddB, Channel Mode=Enhancement, Datasheet URL=http://www.aosmd.com/res/data_sheets/AO3401A.pdf, Datasheet Version="Rev. 3, 03/2011", Drain-Source On-Res=0.044ohm, Drain Current (Max)=4A, Drain Efficiency=NotRequired%, Manufacturer URL=http://www.aosmd.com/, Mounting=SurfaceMount, Mounting Technology=SurfaceMount, Noise Figure=NotRequireddB, Number of  Elements=1, Package URL=http://www.aosmd.com/res/packaging_information/SOT-23-3L.pdf, Pin Count=3, Polarity=P, Rad Hardened=No, Type=PowerMOSFET
Q3 Q4 Q7 Q8: library part CMP-1667-00002-2, "P-Channel Enhancement Mode MOSFET, -30V, -25 A, -55 to 150 degC, 3-Pin DPAK (TO252), RoHS, Tape and Reel", Manufacturer="Diodes Inc", Max Operating Temperature="150 degC", Min Operating Temperature="-55 degC", Package Quantity=2500, ComponentLink1Description="Manufacturer URL", ComponentLink1URL=http://www.diodes.com/, ComponentLink2Description=Datasheet, ComponentLink2URL=http://www.diodes.com/_files/datasheets/ZXMP10A18K.pdf, DatasheetVersion="Rev. 2-2, 08/2014", Height="2.39 mm", Length="6.73 mm", Mount="Surface Mount", Mounting Technology="Surface Mount", PackageDescription="3-Pin Transistor Outline, Body 6.1 x 6.575 mm, Pitch 2.286 mm", PackageReference=TO252-3, Packaging="Tape and Reel", Pins=3, REACH SVHC="No SVHC", RoHSCompliant=true
Q5 Q6 Q9 Q10: library part CMP-0564-00001-1, "NPN Transistor, 0.8 A Collector Current, 3-Pin SOT23, RoHS, Tape and Reel", Manufacturer="Koo Chin", ComponentLink1Description="Manufacturer URL", ComponentLink1URL=http://www.hz-dz.net/, ComponentLink2Description=Datasheet, ComponentLink2URL=http://www.hz-dz.net/UploadFiles/2009812164318190.pdf, ComponentLink3Description="Package Specification", ComponentLink3URL=http://galaxycn.com/jsp/upload/S8050.pdf, DatasheetVersion=17/08/2009, fT(min)="150 MHz", ICBO (max)="0.1 uA", ICEO (max)="0.1 uA", IEBO (max)="0.1 uA", Mounting Technology="Surface Mount", NPN/PNP=NPN, PackageDescription="3-Pin Small Out-Line Transistor, Body 1.3 x 2.9 mm, Pitch 0.95 mm", PackageReference=SOT23-3, Packing="Tape and Reel", PartNumber=S8050, RoHS=TRUE, V (BR) CBO (min)="40 V", V (BR) CEO (min)="25 V", V (BR) EBO (min)="5 V", VBE (sat) (max)="1.2 V", VCE (sat) (max)="0.6 V"
R1 R2 R3 R4 R5 R6 R7 R8 R9 R10 R11 R12 R13 R14 R15 R16 R17 R18 R19 R22 R23 R24 R25 R26 R27 R28 R29 R30 R31 R32 R33 R34 R35: library part RES_3_1, "0603 (1608 Metric) Chip Resistor", Case-EIA=0603, Case-Metric=1608, PackageReference=RESC0603(1608)
SW1: library part CMP-1696-00003-1, "Switch, Tactile, SPST-NO, 50 mA, 12 V, 4-Pin SMD, RoHS, Tape and Reel", Capacitance="4.7 uF", Case\Package=Radial, Max Operating Temperature="85 degC", Min Operating Temperature="-40 degC", Package Quantity=200, Tolerance=20%, Voltage Rating="50 V", ComponentLink1Description="Manufacturer URL", ComponentLink1URL=http://www.e-switch.ch/en/, ComponentLink2Description=Datasheet, ComponentLink2URL=http://spec_sheets.e-switch.com/specs/P010632.pdf, DatasheetVersion="Rev. I, 12/2010", Diameter="5 mm", Height="11 mm", Lead Pitch="2 mm", Length="11 mm", Mount="Through Hole", PackageDescription="4-Pin Surface Mount Device, Body 5 x 5 mm, Pitch 6.3 mm", PackageReference=TL3342F160QG, Packaging=Bulk, Pins=2, Radiation Hardening=No, REACH SVHC="No SVHC", RoHSCompliant=true, Voltage Rating (DC)="50 V", Width="0 inch"
U1: library part MAXM-MAX485CSA+-8, "Low-Power, Slew-Rate-Limited RS-485/RS-422 Transceiver, 3.3 V, 0 to 70 degC, 8-Pin SOIC, RoHS, Tape and Reel", Digital IC Case Style=SOIC, IC Temperature Range=Commercial, Manufacturer=Maxim, Operating Temperature Max=70degC, Operating Temperature Min=0degC, Operating Temperature Range=0degCto+70degC, Supply Current=500μA, Supply Voltage Max=5.25V, Supply Voltage Min=4.75V, Supply Voltage Range=4.75Vto5.25V, Base Number=485, Data Rate=2.5Mbps, Datasheet URL=https://datasheet.ciiva.com/29306/170071-da-01-en-ic-max485csa-so8-29306144.pdf, Datasheet Version="Rev. 8, 10/2003", Device Marking=MAX485CSA+, Device Type=Transceiver, Driver Case Style=SOIC, IC Generic Number=485, Interface=RS-422/RS-485, Interface Type=RS422,RS485, Line / Bus Driver / Receiver / Transceiver Type=CMOSDifferential, Logic Function Number=485, Manufacturer URL=http://www.maximintegrated.com/, No. of Drivers=1, No. of Pins=8, No. of Receivers=1, Package / Case=SOIC, Transceiver Type=Differential
U2: library part TI-MAX3232-SOIC_D-16, "3-V to 5.5-V Multichannel RS-232 Line Driver / Receiver with ±15-kV ESD Protection, 0 to 70 degC, 16-Pin SOIC (D), Green (RoHS & no Sb/Br)", Drivers Per Package=2, Supply Voltage(s)(V)="3.3 or 5.0", ComponentLink1Description="Manufacturer URL", ComponentLink1URL=www.ti.com, ComponentLink2Description=Datasheet, ComponentLink2URL=http://www.ti.com/general/docs/lit/getliterature.tsp?genericPartNumber=MAX3232&fileType=pdf, ComponentLink3Description="Package Specification", ComponentLink3URL=http://www.ti.com/litv/pdf/mpds178g, DatasheetVersion=SLLS410I, ESD HBM(kV)=+/-15, ICC(Max)(mA)=1, PackageDescription="16-Pin Plastic Small Outline Integrated Circuit, 9.9 x 3.9 mm, Pitch 1.27 mm Pitch", PackageReference=D0016A, PackageVersion="revM, Jun-2011", Receivers Per Package=2, RS-232=TRUE, Single Supply=TRUE, SubFamily=RS-232
U3: library part CMP-0323-00209-2, "Buck Step Down Regulator with 3.5 to 28 V Input and 0.8 to 25 V Output, -40 to 150 degC, 8-Pin SOIC (D), Green (RoHS & no Sb/Br)", Manufacturer="Texas Instruments", Rating=Catalog, Switch Current Limit(Typ)(A)=3.5, Code_JEDEC=MS-012AA, ComponentLink1Description=Datasheet, ComponentLink1URL=http://www.ti.com/general/docs/lit/getliterature.tsp?genericPartNumber=TPS54331&fileType=pdf, ComponentLink2Description="Package Specification", ComponentLink2URL=http://www.ti.com/litv/pdf/msoi002j, ComponentLink3Description="URL Link1", ComponentLink3URL="Samples URL:http://www.ti.com/product/tps54331#samples", DatasheetVersion=SLVS839D, Duty Cycle(Max)(%)=90, Eco-Plan="Green (RoHS & no Sb/Br)", Iout(Max)(A)=3, Iq(Typ)(mA)=0.11, Mounting Technology="Surface Mount", PackageDescription="8-Pin Plastic Small Outline Integrated Circuit, 4.9 x 3.9 mm, Pitch 1.27 mm Pitch", PackageReference=D8, PackageVersion="revM, Jun-2011", PartNumber=TPS54331DR, Regulated Outputs(#)=1, SubFamily="Step-Down Regulator", Topology=Buck, Vin(Max)(V)=28, Vin(Min)(V)=3.5, Vout(Max)(V)=25, Vout(Min)(V)=0.8
U4: library part CMP-0237-00215-3, "ARM Cortex-M3 32-bit MCU, 64 KB Flash, 20 KB Internal RAM, 37 I/Os, 48-pin LQFP, -40 to 85 degC, Tray", I/Os (High Current)=37, Operating Frequency(F) (Processor speed) (MHz)=72, Supply Voltage(Vcc) min (V)=2, A/D Converter="2x12-bit (10 Channel)", ComponentLink1Description="Manufacturer URL", ComponentLink1URL=http://www.st.com/web/en/home.html, ComponentLink2Description=Datasheet, ComponentLink2URL=http://www.st.com/st-web-ui/static/active/en/resource/technical/document/datasheet/CD00161566.pdf, ComponentLink3Description="Package Specification", ComponentLink3URL=http://www.st.com/st-web-ui/static/active/en/resource/technical/document/datasheet/DM00058181.pdf, Core="ARM Cortex-M3", DatasheetVersion="Rev. 16", FLASH Size (Prog) (kB)=64, Internal RAM Size (kB)=20, Mounting Technology="Surface Mount", PackageDescription="48-Pin Low Profile Quad Flat Package, 7 x 7 mm Body, 0.5 mm Pitch", PackageReference=LQFP48, PackageVersion="Rev. 6, 06/2013", Packing=Tray, PartNumber=STM32F103C8T6
U5: library part CMP-0062-01638-4, "800mA Low-Dropout Linear Regulator, 4-pin SOT-223, Pb-Free", Manufacturer="Texas Instruments", PackageTopMarking=XYTT*N05A, PowerWise=N, Code_IPC=SOT223-4, Code_JEDEC=TO-261-AA, ComponentLink1Description="Datasheet URL", ComponentLink1URL=http://www.ti.com/general/docs/lit/getliterature.tsp?genericPartNumber=LM1117-N&fileType=pdf, CompType="LDO IC", High-Reliability=Y, PackageDescription="Molded SOT-223, 6.50 x 3.56 x 1.6mm Body, 4 Lead, 2.3mm Pitch", PackageReference=DCY0004A, PartNumber=LM1117MP-3.3/NOPB, PinCount=4, RoHS=Y
X1: library part CMP-1215-00001-1, "At-Cut Crystal Unit, 3.5 to 30 MHz, -40 to 85 degC, 2-Pin 11.4?—4.7?—4.3 mm SMD, RoHS, Reel", Manufacturer="Citizen Finetech Miyota", Operating Temperature="-40 to 85 degC", C0="7 pF Max.", ComponentLink1Description="Manufacturer URL", ComponentLink1URL=http://cfm.citizen.co.jp/english/index.html, ComponentLink2Description=Datasheet, ComponentLink2URL=http://cfm.citizen.co.jp/english/product/pdf/HCM49.pdf, ComponentLink3Description="Package Specification", ComponentLink3URL=http://cfm.citizen.co.jp/english/product/pdf/HCM49.pdf, DatasheetVersion=Jan-12, DL="100 uW", f0="3.5 to 30 MHz", IR="500 MOhm Min.", Mounting Technology="Surface Mount", PackageDescription="2-Pin Surface Mount, Body 11.4 x 4.7 mm, Pitch 8.5 mm", Packing=Reel, PartNumber=HCM49-8.000MABJ-UT, R1="50 to 200 Ohm", RoHS=TRUE
H1 H2 H3 H4 H5 H6: AGILE_PN=210-75685, CAD_APPROVED=Yes, CLASS=IC, Height="4.8 MM", MFG_NAME01="COMPONENTS CORPORATION", MFG_PN01=TP-105-01-09, RoHS=Yes

## Via types
v1: diameter 20, hole 12, Top Layer to Bottom Layer, tented both sides, 334 vias
v2: diameter 20, hole 12, Top Layer to Bottom Layer, 106 vias

## Nets (pads, with @x,y where several pads share a name; then routed paths per layer and width w, separated by ;. In a path a pad name is that pad's centre, name@x,y a point inside that pad or via, vN(x,y) a via of type N, cw(c..) or ccw(c..) an arc to the next point about the centre after c; other vN are vias at no path point)
3V3: C22.2 C23.2 C30.2 C31.2 C32.2 C33.2 C34.2 C35.2 FB1.1 P1.1 Q1.2 Q2.2 R3.1 R5.1 R8.1 R9.1 R35.2 U4.1 U4.24 U4.36 U4.48 U5.2 U5.4 | length 4621.3
  Top Layer w10: U4.24@4068.27,611.54 4068.27,548.23 4122.56,493.94 C31.2@4122.56,490 ; U4.36@4118.46,878.27 4191.77,878.27 4216.06,902.56 C34.2@4220,902.56 v1(4220,945.96)
  Top Layer w20: v1(3526.07,645) 3533.11,637.95 3561.22,637.95 C35.2@3565,634.17 3568.94,634.17 3572.72,630.39 3572.72,626.46 3573.43,625.75 FB1.1@3573.43,575
  Top Layer w40: C31.2@4122.56,490 4168,490 v1(4170,492)
  Bottom Layer w20: 3855,973.93 3855,1175
  Bottom Layer w40: v1(1285,308.34) v1(1325,308.34) 2869.85,308.34 3067.57,506.06 v1(3295,506.06) 3451.06,350 4285,350 4350,415 4350,465 4300,515 4193,515 v1(4170,492) 4051.69,492 3933.69,610 ; 3878.05,994.31 v1(3878.05,1175)
  other v1: 3295,464.68 3913.05,1175 3878.05,1210 3913.05,1210
3V3_485: C1.2 C2.2 Q1.3 R1.1 R3.2 U1.8 | length 613.3
  Top Layer w20: R1.1@959.88,30 960,30.12 v1(960,71.04) ; C2.2@1212.44,90 C2.2@1212.44,93.94 ; R3.2@1290,192.44 1380.32,192.44 Q1.3@1400,172.76 1400,122.13 1367.87,90 C1.2@1360,90
  Bottom Layer w20: v1(960,71.04) 1199.8,71.04 v1(1275,146.24)
5V: C14.1 C16.2 C17.2 C20.2 C21.2 C38.2 L1.2 Q3.2 R10.1 R27.1 U5.3 | length 2205.8
  Top Layer w12: Q3.2@4355,303.39 4355,273.07 4407.41,220.66 4547.45,220.66 4585,183.11 4585,102.6 4622.6,65 4670.43,65 4695.06,40.37 4695.06,12.78 R10.1@4702.84,5
  Top Layer w16: R27.1@3417.56,1552.56 3489.3,1624.3 3499.3,1624.3 C16.2@3510,1635 C16.2@3510.06,1635.06 ; C17.2@3604.94,1635.06 C17.2@3605,1635.12
  Top Layer w20: C38.2@4702.56,-70 4702.7,-69.86 4702.7,4.86 R10.1@4702.84,5
  Top Layer w40: Q3.2@4355,304.45 4355,845.77 4412.43,903.21 4412.43,1008.65 ; 4443.79,1040 4806.97,1040 4880,1113.03 4880,1370
  other v1: 4845,1500 4895,1500 4945,1500 4845,1550 4895,1550 4945,1550 4845,1600 4895,1600 4945,1600 3677.99,1620 3722.5,1620 3767.01,1620 3811.52,1620 3856.02,1620 4845,1650 4895,1650 4945,1650 3677.99,1670 3722.5,1670 3767.01,1670 3811.52,1670 3856.02,1670 3520,1700.06 3565,1700.06 4845,1700 4895,1700 4945,1700 3520,1745 3565,1745 4845,1750 4895,1750 4945,1750 4845,1800 4895,1800 4945,1800
5V_EN: M1.1 R26.2 R28.1 U3.3 | length 2565
  Top Layer w16: R28.1@2825,1567.56 R26.2@2825,1617.44 2826.28,1618.72 v1(2885,1618.72) 2991.79,1618.72 U3.3@2993.07,1620
  Bottom Layer w10: M1.1@1100.83,715 1190.83,805 2180,805 2295,920 2295,1240 2673.72,1618.72 v1(2885,1618.72)
12V: C11.1 C12.2 C13.2 C29.1 C39.2 C40.2 C41.2 E8.A2 E9.A1 M1.9 M1.10 M1.11 M1.12 Q4.2 Q7.2 Q8.2 R11.1 R18.1 R19.1 R26.1 U3.2 | length 2296.5
  Top Layer w20: Q8.2@455,312.78 455,282.46 465.87,271.6 575.27,271.6 623.13,223.74 658.7,223.74 700,182.44 700,-105 755,-160 776.5,-160 827.56,-108.94 C41.2@827.56,-105 827.56,-101.06 841.06,-87.56 R19.1@895,-87.56 v1(940,-87.56) ; Q7.2@1600,312.78 1600,282.46 1610.87,271.6 1684.63,271.6 1726.23,230 1812.44,230 1845,197.44 1845,13.74 1893.77,-35.03 1925.03,-35.03 1957.56,-67.56 C40.2@1957.56,-90 v1(2065,-90) ; Q4.2@3500,303.39 3500,273.07 3558.24,214.83 3715.63,214.83 3763,167.45 3763,65.73 3813.66,15.07 C39.2@3817.6,15.07 3821.38,11.29 3833.71,11.29 3885.04,-40.04 R11.1@3905,-40.04
  other v1: 2277.78,-217.82 2327.78,-217.82 2377.78,-217.82 2427.78,-217.82 2477.78,-217.82 2527.78,-217.82 2220,-167.82 2277.78,-167.82 2327.78,-167.82 2377.78,-167.82 2427.78,-167.82 2477.78,-167.82 2527.78,-167.82 2170,-117.82 2220,-117.82 2170,-67.82 2220,-67.82 2170,-17.82 2220,-17.82 3315.71,19.66 3353.38,19.66 3391.05,19.66 2170,32.18 2220,32.18 3315.71,57.33 3353.38,57.33 3391.05,57.33 3315.71,95 3353.38,95 3391.05,95 3315.71,132.67 3355,132.67 3391.05,132.67 215,315 265,315 315,315 365,315 215,365 265,365 315,365 365,365
485_N: R4.2 R6.2 R7.1 U1.7 | length 245.7
  Top Layer w15: U1.7@1142.09,201.73 1142.09,172.95 1129.59,160.45 1129.59,54.04 1148.46,35.16 R6.2@1152.4,35.16 1157.56,30 R7.1@1212.44,30
485_P: R1.2 R2.2 R4.1 U1.6 | length 250
  Top Layer w15: R1.2@1015,30 1017.58,32.58 1075.02,32.58 R2.2@1077.6,35.16 1081.54,35.16 1104.59,58.21 1104.59,160.45 1092.09,172.95 U1.6@1092.09,201.73
ADC1: C24.2 R31.1 R33.2 U4.10 | length 1089.3
  Top Layer w10: U4.10@3801.54,701.1 3801.61,701.18 3832.86,701.18 3854.66,722.98 v1(4025,722.98) ; R31.1@4578.88,610 4579.44,609.44 4579.44,430.56 v1(4580,430)
  Bottom Layer w10: v1(4025,722.98) 4287.02,722.98 v1(4580,430)
ADC2: C25.2 R32.1 R34.2 U4.11 | length 1132.3
  Top Layer w10: U4.11@3801.54,681.42 3801.61,681.34 3968.83,681.34 3968.91,681.42 v1(3970,680.33) ; R34.2@4577.38,834.76 4578.69,833.45 4578.69,663.81 v1(4580,662.5)
  Bottom Layer w10: v1(3970,680.33) 3970,746.95 4038.05,815 4465,815 4580,700 v1(4580,662.5)